# Altium PCB PCB3.PcbDoc
Units mil, origin at the board's own origin, x right, y up, seen from the top; angles counter-clockwise.
Board outline 2952.76 x 2690 mil, 2 copper layers (Top Layer, Bottom Layer); 45 components, 26 nets, 166 pads, 7 vias.
Unrouted connection lines stored in the file: 35.
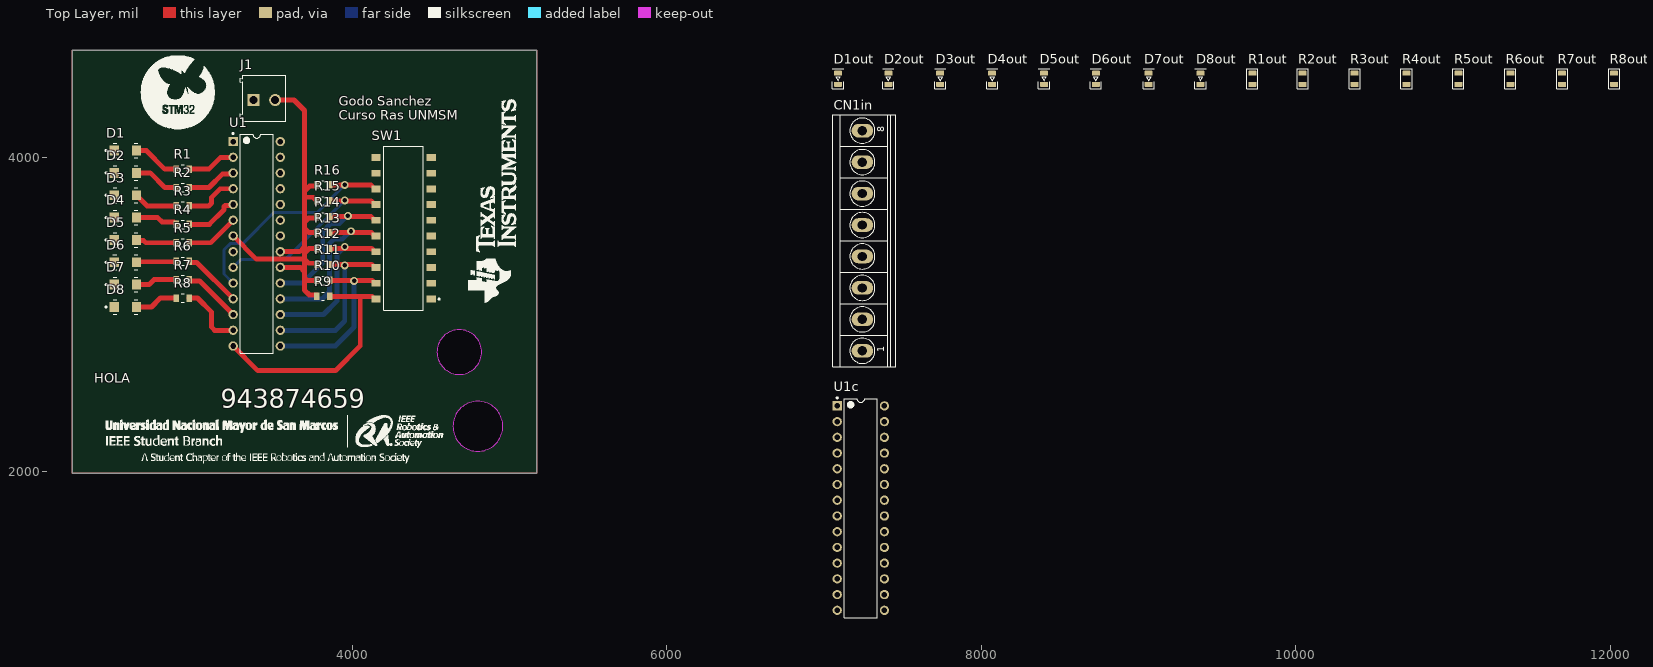
[diagram p0: Top Layer view]
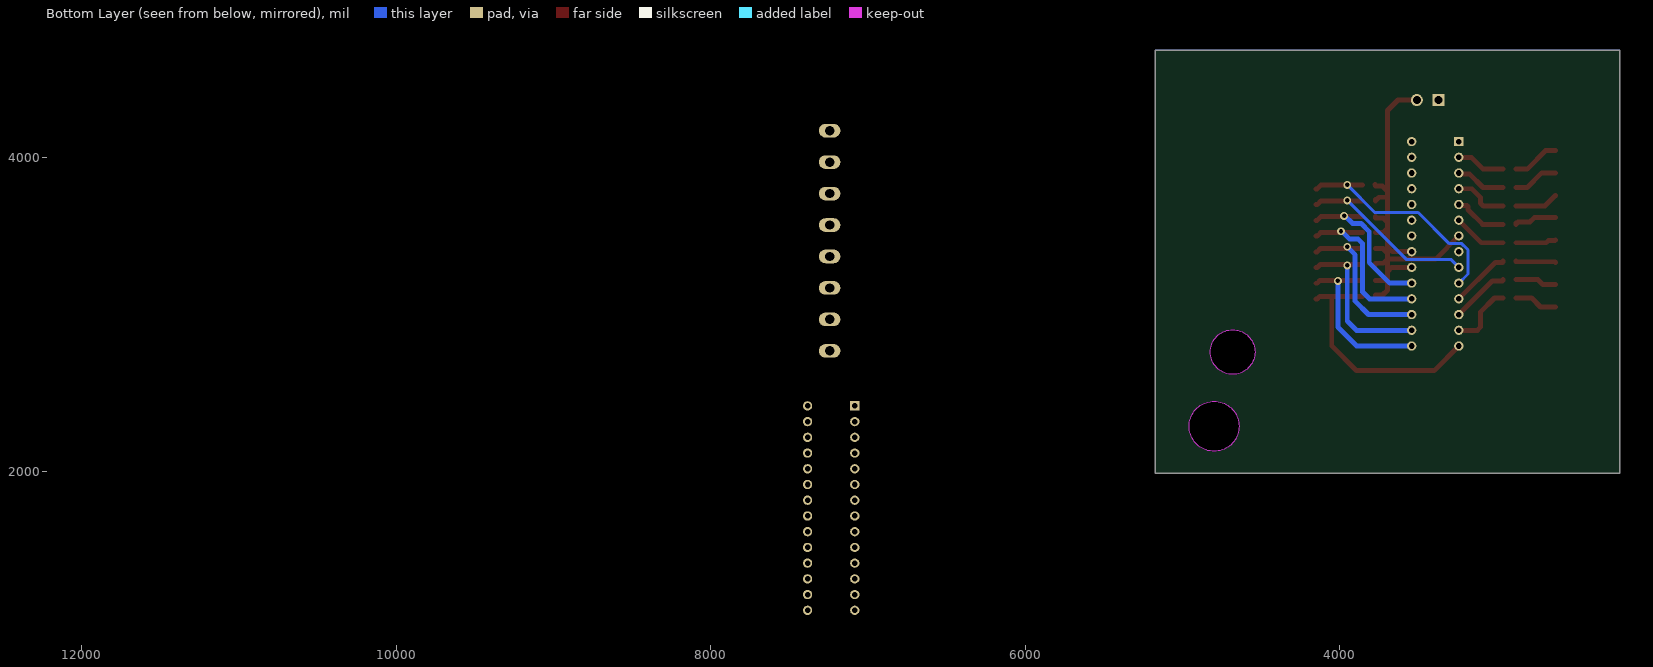
[diagram p1: Bottom Layer view, seen from below]

## Layer stack, top to bottom
Top Solder: solder mask 0.4, Solder Resist, Dk 3.5
Top Layer: signal copper 1.4
Dielectric 1: dielectric 12.6, FR-4, Dk 4.8
Bottom Layer: signal copper 1.4
Bottom Solder: solder mask 0.4, Solder Resist, Dk 3.5

## Board outline
2221.26,1990.79 2221.26,4680.79 5174.02,4680.79 5174.02,1990.79
cut-out: 4539.94,2762.44 ccw(c4681.89,2762.44) 4681.89,2620.49 ccw(c4681.89,2762.44) 4823.84,2762.44 ccw(c4681.89,2762.44) 4681.89,2904.39 ccw(c4681.89,2762.44)
cut-out: 4641.29,2290 ccw(c4800,2290) 4800,2131.29 ccw(c4800,2290) 4958.71,2290 ccw(c4800,2290) 4800,2448.71 ccw(c4800,2290)

## Design rules (kind name [scope] priority, off if disabled: settings)
AssemblyTestPointUsage [All] p1 off:
Clearance [All] p1 off: gap=10 ignorepadtopadclearanceinfootprint=FALSE except(0: Arc-Hole Track-Hole SMDPad-Hole THPad-Hole Via-Hole Fill-Hole Poly-Hole Region-Hole Text-Hole)
ComponentClearance [All] p1 off: gap=10 collisioncheckmode=3 verticalgap=10 showdistances=FALSE
DiffPairsRouting [All] p1 off: maxlimit=10 minlimit=10 mostfreqgap=10 toplayer_minwidth=15 toplayer_maxwidth=15 toplayer_prefwidth=15 bottomlayer_minwidth=15 bottomlayer_maxwidth=15 bottomlayer_prefwidth=15 maxuncoupledlength=500
FabricationTestPointUsage [All] p1 off: valid=0 allowmultiple=FALSE
FabricationTestpoint [All] p1 off: side=3 testpointundercomponent=TRUE minsize=40 maxsize=100 preferedsize=60 minholesize=0 maxholesize=40 preferedholesize=32 testpointgrid=1 allowsidetop=TRUE allowsidebottom=TRUE usegrid=TRUE gridtolerance=0.01
FanoutControl Fanout_BGA [IsBGA] p1 off: bgadir=Out bgaviamode=Centered fanoutstyle=Auto fanoutdirection=Alternating viagrid=1 // Fanout_BGA (Default Rule)
FanoutControl Fanout_LCC [IsLCC] p2 off: bgadir=Out bgaviamode=Centered fanoutstyle=Auto fanoutdirection=Alternating viagrid=1 // Fanout_LCC (Default Rule)
FanoutControl Fanout_SOIC [IsSOIC] p3 off: bgadir=Out bgaviamode=Centered fanoutstyle=Auto fanoutdirection=Alternating viagrid=1 // Fanout_SOIC (Default Rule)
FanoutControl Fanout_Small [(CompPinCount < 5)] p4 off: bgadir=Out bgaviamode=Centered fanoutstyle=Auto fanoutdirection=OutThenIn viagrid=1 // Fanout_Small (Default Rule)
FanoutControl Fanout_Default [All] p5 off: bgadir=Out bgaviamode=Centered fanoutstyle=Auto fanoutdirection=Alternating viagrid=1 // Fanout_Default (Default Rule)
Height [All] p1 off: minheight=0 maxheight=1000 prefheight=500
HoleSize [All] p1 off: absolutevalues=TRUE maxlimit=100 minlimit=1 maxpercent=80.000 minpercent=20.000
HoleToHoleClearance [All] p1 off: gap=10 allowstackedmicrovias=TRUE
LayerPairs [All] p1 off: enforce=TRUE
MinimumSolderMaskSliver [All] p1 off: minsoldermaskwidth=10
NetAntennae [All] p1 off: netantennaetolerance=0
PasteMaskExpansion [All] p1 off: expansion=0
PlaneClearance [All] p1 off: clearance=20
PlaneConnect [All] p1 off: planeconnectstyle=Relief reliefexpansion=20 reliefentries=4 reliefconductorwidth=10 reliefairgap=10
PolygonConnect [All] p1 off: connectstyle=Relief reliefconductorwidth=10 reliefentries=4 polygonreliefangle="90 Angle" airgapwidth=10
RoomDefinition U_Outputs [InComponentClass('U_Outputs')] p1 off: confinementstyle=ConfineIn formatcopy=TRUE lockcomponents=FALSE outline 7045,4425 12275,4425 12275,4675 7045,4675
RoomDefinition U_Input [InComponentClass('U_Input')] p2 off: confinementstyle=ConfineIn formatcopy=TRUE lockcomponents=FALSE outline 7045,2640 7470,2640 7470,4380 7045,4380
RoomDefinition U_CPU [InComponentClass('U_CPU')] p3 off: confinementstyle=ConfineIn formatcopy=TRUE lockcomponents=FALSE outline 7045,1060 7425,1060 7425,2590 7045,2590
RoutingCorners [All] p1 off: cornerstyle=45-Degree minsetback=100 maxsetback=100
RoutingLayers [All] p1 off: top layer_v5=TRUE bottom layer_v5=TRUE
RoutingPriority [All] p1 off: routingpriority=0
RoutingTopology [All] p1 off: topology=Shortest
RoutingVias [All] p1 off: holewidth=28 width=50 viastyle="Through Hole" minholewidth=28 minwidth=50 maxholewidth=28 maxwidth=50
ShortCircuit [All] p1 off: allowed=FALSE
SilkToSilkClearance [All] p1 off: silktosilkclearance=10
SilkToSolderMaskClearance [IsPad] p1 off: minsilkscreentomaskgap=10 clearancetoexposedcopper=TRUE
SolderMaskExpansion [All] p1 off: expansion=4 istentingtop=FALSE
UnRoutedNet [All] p1 off:
UnpouredPolygon [All] p1 off:
Width [All] p1 off: maxlimit=10 minlimit=10 preferedwidth=10
2 further rules are at their usual default settings.

## Classes and differential pairs
component class U_Outputs: D1out D2out D3out D4out D5out D6out D7out D8out R1out R2out R3out R4out R5out R6out R7out R8out
component class U_Input: CN1in
component class U_CPU: U1c

## Components (designator, comment, footprint, x,y, rotation, side; value= is the part's Value field where it differs from the comment)
CN1in "TB08" TB508-08 7245,3470 r90 top
D1 "LTST-C230KRKT" FP-LTST-C230KRKT-MFG 2558.11,4043.82 r0 top
D1out "LED" LED-0805 7090,4500 r90 top
D2 "LTST-C230KRKT" FP-LTST-C230KRKT-MFG 2558.11,3901.68 r0 top
D2out "LED" LED-0805 7410,4500 r90 top
D3 "LTST-C230KRKT" FP-LTST-C230KRKT-MFG 2558.11,3759.53 r0 top
D3out "LED" LED-0805 7740,4500 r90 top
D4 "LTST-C230KRKT" FP-LTST-C230KRKT-MFG 2558.11,3617.39 r0 top
D4out "LED" LED-0805 8070,4500 r90 top
D5 "LTST-C230KRKT" FP-LTST-C230KRKT-MFG 2558.11,3475.25 r0 top
D5out "LED" LED-0805 8400,4500 r90 top
D6 "LTST-C230KRKT" FP-LTST-C230KRKT-MFG 2558.11,3333.1 r0 top
D6out "LED" LED-0805 8730,4500 r90 top
D7 "LTST-C230KRKT" FP-LTST-C230KRKT-MFG 2558.11,3190.96 r0 top
D7out "LED" LED-0805 9065,4500 r90 top
D8 "LTST-C230KRKT" FP-LTST-C230KRKT-MFG 2558.11,3048.82 r0 top
D8out "LED" LED-0805 9395,4500 r90 top
J1 "691214110002" 691214110002 3441.73,4376.61 r0 top
R1 "RT0805BRD07249RL" FP-RT0805-MFG 2923.03,3925.79 r180 top value=249Ω
R1out "1k0" R0805 9725,4500 r90 top
R2 "RT0805BRD07249RL" FP-RT0805-MFG 2923.03,3808.64 r180 top value=249Ω
R2out "1k0" R0805 10045,4500 r90 top
R3 "RT0805BRD07249RL" FP-RT0805-MFG 2923.03,3691.5 r180 top value=249Ω
R3out "1k0" R0805 10375,4500 r90 top
R4 "RT0805BRD07249RL" FP-RT0805-MFG 2923.03,3574.36 r180 top value=249Ω
R4out "1k0" R0805 10705,4500 r90 top
R5 "RT0805BRD07249RL" FP-RT0805-MFG 2923.03,3457.22 r180 top value=249Ω
R5out "1k0" R0805 11035,4500 r90 top
R6 "RT0805BRD07249RL" FP-RT0805-MFG 2923.03,3340.07 r180 top value=249Ω
R6out "1k0" R0805 11365,4500 r90 top
R7 "RT0805BRD07249RL" FP-RT0805-MFG 2923.03,3222.93 r180 top value=249Ω
R7out "1k0" R0805 11695,4500 r90 top
R8 "RT0805BRD07249RL" FP-RT0805-MFG 2923.03,3105.79 r180 top value=249Ω
R8out "1k0" R0805 12025,4500 r90 top
R9 "RT0805BRD07249RL" FP-RT0805-MFG 3815.75,3116.77 r0 top value=249Ω
R10 "RT0805BRD07249RL" FP-RT0805-MFG 3815.75,3218.01 r0 top value=249Ω
R11 "RT0805BRD07249RL" FP-RT0805-MFG 3815.75,3319.25 r0 top value=249Ω
R12 "RT0805BRD07249RL" FP-RT0805-MFG 3815.75,3420.48 r0 top value=249Ω
R13 "RT0805BRD07249RL" FP-RT0805-MFG 3815.75,3521.72 r0 top value=249Ω
R14 "RT0805BRD07249RL" FP-RT0805-MFG 3815.75,3622.96 r0 top value=249Ω
R15 "RT0805BRD07249RL" FP-RT0805-MFG 3815.75,3724.2 r0 top value=249Ω
R16 "RT0805BRD07249RL" FP-RT0805-MFG 3815.75,3825.43 r0 top value=249Ω
SW1 "A6S-0102-PH" FP-A6S-0102-PH-MFG 4327.56,3549.84 r90 top
U1 "ATmega328-PU" 28P3 3393.78,3450.79 r0 top
U1c "ATmega328-PU" 28P3 7235,1770 r0 top

## Footprints (in the part's own frame and the unit in brackets; to place one, negate y for a bottom-side part, rotate by r counter-clockwise, add the part's x,y. Pads: shape width x height; smd on the part's side, far side on the other; paste and mask are expansions set on the pad)
28P3 [mm] "28-Pin Plastic Dual In-Line Package (PDIP)"
  rect 1.5x1.5 hole 0.9: 1(-3.81,16.51)
  round 1.5 hole 0.9: 2(-3.81,13.97) 3(-3.81,11.43) 4(-3.81,8.89) 5(-3.81,6.35) 6(-3.81,3.81) 7(-3.81,1.27) 8(-3.81,-1.27) 9(-3.81,-3.81) 10(-3.81,-6.35) 11(-3.81,-8.89) 12(-3.81,-11.43) 13(-3.81,-13.97) 14(-3.81,-16.51) 15(3.81,-16.51) 16(3.81,-13.97) 17(3.81,-11.43) 18(3.81,-8.89) 19(3.81,-6.35) 20(3.81,-3.81) 21(3.81,-1.27) 22(3.81,1.27) 23(3.81,3.81) 24(3.81,6.35) 25(3.81,8.89) 26(3.81,11.43) 27(3.81,13.97) 28(3.81,16.51)
  silkscreen extent -3.93,-17.7 2.65,17.93, body extent -3.6,-17.65 3.6,17.65, height 4.58
691214110002 [mm] "3.50 mm Horizontal Entry Modular, 2p"
  rect 1.95x1.95 hole 1.3: 1(-1.75,-0.3)
  round 1.95 hole 1.3: 2(1.75,-0.3)
  silkscreen extent -3.9,-3.7 3.5,3.7, body extent -3.95,-3.7 3.5,3.7, height 8.55
FP-A6S-0102-PH-MFG [mm]
  rect 1.1x1.5 smd paste+0 mask+0: 1(-11.43,-4.45) 2(-8.89,-4.45) 3(-6.35,-4.45) 4(-3.81,-4.45) 5(-1.27,-4.45) 6(1.27,-4.45) 7(3.81,-4.45) 8(6.35,-4.45) 9(8.89,-4.45) 10(11.43,-4.45) 11(11.43,4.45) 12(8.89,4.45) 13(6.35,4.45) 14(3.81,4.45) 15(1.27,4.45) 16(-1.27,4.45) 17(-3.81,4.45) 18(-6.35,4.45) 19(-8.89,4.45) 20(-11.43,4.45)
  silkscreen extent -13.27,-5.88 13.27,3.2, body extent -13.37,-5.3 13.37,5.3, height 0.25
FP-LTST-C230KRKT-MFG [mm]
  rect 1.5x1.6 smd paste+0 mask+0: 1(-1.8,0) 2(1.8,0)
  silkscreen extent -3.22,-1.19 1.99,1.19, body extent -2.65,-0.95 2.65,0.95, height 0.25
FP-RT0805-MFG [mm]
  rect 0.9x1.2 smd paste+0 mask+0: 1(-1.05,0) 2(1.05,0)
  silkscreen extent -0.23,-0.67 0.23,0.67, body extent -1.6,-0.77 1.6,0.77, height 0.25
LED-0805 [mm] "SMT LED DIODE 0805"
  rrect25% 0.8x1.3 smd: 1(-0.9,0) 2(0.9,0)
  silkscreen extent -1.6,-0.9 1.6,0.9, body extent -1.01,-0.62 1.01,0.63, height 1.1
R0805 [mm] "SMD RESISTOR 0805"
  rrect25% 0.8x1.3 smd: 1(-0.9,0) 2(0.9,0)
  silkscreen extent -1.6,-0.9 1.6,0.9, body extent -1,-0.62 1,0.63, height 0.45
TB508-08 [mm] "Vertical terminal block 0.2 inch (5.08mm) pitch"
  oval 2.2x3.5 hole 1.5: 1(-17.78,0) 2(-12.7,0) 3(-7.62,0) 4(-2.54,0) 5(2.54,0) 6(7.62,0) 7(12.7,0) 8(17.78,0)
  silkscreen extent -20.32,-5.4 20.32,4.8, body extent -20.86,-4.67 20.35,4.83, height 15.03

## Part data
CN1in: library part TB-08, "Terminal Block"
D1 D2 D3 D4 D5 D6 D7 D8: library part CMP-22017-000041-1, "LED RED CLEAR CHIP SMD", Case Code (Imperial)=1206, Case Code (Metric)=3216, Color=Red, Forward Current=30mA, Forward Voltage=2V, Lens Color=Colorless, Max Operating Temperature=85°C, Min Operating Temperature=-55°C, Package Quantity=1, Power Dissipation=75mW, Reverse Voltage=5V, Test Current=20mA, Case/Package=1206, Depth=1.6mm, Dominant Wavelength=631nm, Height=1.1mm, Illumination Color=Red, Lead Free="Lead Free", Length=3.2mm, Lens Style=Diffused, Lens Transparency=Clear, Luminous Intensity=54mcd, Mount="Surface Mount", Number of Elements=1, Number of LEDs=1, Number of Pins=2, Packaging="Tape and Reel", Power Rating=75mW, Radiation Hardening=No, RoHS Compliant=Yes, Viewing Angle=130°, Wavelength=639nm, Width=1.6mm
D1out D2out D3out D4out D5out D6out D7out D8out: "LED - Light-Emitting Diode"
J1: library part CMP-1502-02464-1, "Serie 2141 - 3.50 mm Horizontal Entry Modular with Rising Cage Clamp WR-TBL, 2 pin", Manufacturer="Wurth Elektronik", Operating Temperature=-40to105degC, Datasheet URL=http://katalog.we-online.de/em/datasheet/6912141100xx.pdf, Manufacturer URL=http://www.we-online.de, Mounting Technology=THT, Package Reference=691214110002, Packaging=Box, Part number=691214110002, Pin Number=2, Pitch=3.50mm, Publisher=WurthElektronik
R1 R2 R3 R4 R5 R6 R7 R8 R9 R10 R11 R12 R13 R14 R15 R16: library part CMP-03412-035801-1, "RES SMD 249 OHM 0.1% 1/8W 0805", Manufacturer=Yageo, Package=RT0805, Power Rating=0.125W, Resistance=249Ω, Temperature="-55°C to +155°C", Temperature Coefficient="25 ppm/°C", Temperature Range High=+155°C, Temperature Range Low=-55°C, Tolerance=0.0025, Voltage Rating=150V, Automotive=No, Category=Res, ComponentLink2Description=Datasheet, ComponentLink2URL=http://www.yageo.com/documents/recent/PYu-RT_1-to-0.01_RoHS_L_9.pdf, Composition="Thin Film", Device Class L1="Passive Components", Device Class L2=Resistors, Device Class L3="Chip SMD Resistors", Digikey Description="RES SMD 249 OHM 0.1% 1/8W 0805", Footprint Url=http://www.yageo.com/exep/pages/download/literatures/PYu-R_Mount_10.pdf, Height=0.6mm, Ipc Land Pattern Name=RESC200125X50, Lead Free=Yes, Manufacturer Part Number=RT0805BRD07249RL, Mouser Description="Res SMD 249 Ohm .1% 0805", Octopart=https://octopart.com/rt0805brd07249rl-yageo-1410573, RoHS=TRUE, Series=RT
R1out R2out R3out R4out R5out R6out R7out R8out: library part Resistor, "Single resistor", Power=0.125W, Unit price=0.1
SW1: library part CMP-08827-000074-1, "SWITCH SLIDE DIP SPST 25MA 24V", Case/Package=DIP, Contact Resistance=200mR, Current Rating=25mA, Max Operating Temperature=70°C, Max Voltage Rating (DC)=24V, Min Operating Temperature=-20°C, Package Quantity=900, Actuator Length=0mm, Actuator Type="Slide (Standard)", Contact Plating=Gold, Electrical Life=1000Cycles, Length=1.037inch, Max Current Rating=25mA, Mechanical Life=1000Cycles, Mount="Surface Mount", Number of Positions=10, Orientation=Straight, Packaging="Tape and Reel", Pitch=0.1inch, Radiation Hardening=No, RoHS Compliant=Yes, Series=A6S-H, Terminal Pitch=2.54mm, Termination="Gull Wing", Throw Configuration=SPST, Voltage Rating (DC)=24V, Washable=Yes, Weight=0.87g
U1 U1c: library part CMP-0095-00015-2, "8-bit AVR Microcontroller, 32KB Flash, 1KB EEPROM, 2KB SRAM, 28-pin PDIP, Industrial Grade (-40°C to 85°C)", ComponentLink1Description="Manufacturer URL", ComponentLink1URL=http://www.atmel.com/, ComponentLink2Description="ATmega48A/48PA/88A/88PA/168A/168PA/328/328P Datasheet", ComponentLink2URL=http://www.atmel.com/dyn/resources/prod_documents/8271.pdf, ComponentLink3Description="ATmega48A/48PA/88A/88PA/168A/168PA/328/328P Summary", ComponentLink3URL=http://www.atmel.com/dyn/resources/prod_documents/8271S.pdf, DatasheetVersion="revD, May-2011", PackageDescription="28-lead (0.300\"/7.62mm Wide) Plastic Dual Inline Package (PDIP)", PackageReference=28P3, PackageVersion="revB, Sep-2001", RevisionNote="DatasheetVersion updated. URLs added."

## Via types
v1: diameter 50, hole 28, Top Layer to Bottom Layer, 7 vias

## Nets (pads, with @x,y where several pads share a name; then routed paths per layer and width w, separated by ;. In a path a pad name is that pad's centre, name@x,y a point inside that pad or via, vN(x,y) a via of type N, cw(c..) or ccw(c..) an arc to the next point about the centre after c; other vN are vias at no path point)
GND: D1out.1 D2out.1 D3out.1 D4out.1 D5out.1 D6out.1 D7out.1 D8out.1 U1c.8 U1c.22
In0: CN1in.8 U1c.14
In1: CN1in.7 U1c.15
In2: CN1in.6 U1c.16
In3: CN1in.5 U1c.17
In4: CN1in.4 U1c.18
In5: CN1in.3 U1c.19
In6: CN1in.2 U1c.9
In7: CN1in.1 U1c.10
NetD1out_2: D1out.2 R1out.1
NetD2out_2: D2out.2 R2out.1
NetD3out_2: D3out.2 R3out.1
NetD4out_2: D4out.2 R4out.1
NetD5out_2: D5out.2 R5out.1
NetD6out_2: D6out.2 R6out.1
NetD7out_2: D7out.2 R7out.1
NetD8out_2: D8out.2 R8out.1
Out0: R8out.2 U1c.2
Out1: R7out.2 U1c.3
Out2: R6out.2 U1c.4
Out3: R5out.2 U1c.5
Out4: R4out.2 U1c.6
Out5: R3out.2 U1c.11
Out6: R2out.2 U1c.12
Out7: R1out.2 U1c.13
VCC: U1c.7 U1c.20 U1c.21
pads on no net: D1.1 D1.2 D2.1 D2.2 D3.1 D3.2 D4.1 D4.2 D5.1 D5.2 D6.1 D6.2 D7.1 D7.2 D8.1 D8.2 J1.1 J1.2 R1.1 R1.2 R2.1 R2.2 R3.1 R3.2 R4.1 R4.2 R5.1 R5.2 R6.1 R6.2 R7.1 R7.2 R8.1 R8.2 R9.1 R9.2 R10.1 R10.2 R11.1 R11.2 R12.1 R12.2 R13.1 R13.2 R14.1 R14.2 R15.1 R15.2 R16.1 R16.2 SW1.1 SW1.2 SW1.3 SW1.4 SW1.5 SW1.6 SW1.7 SW1.8 SW1.9 SW1.10 SW1.11 SW1.12 SW1.13 SW1.14 SW1.15 SW1.16 SW1.17 SW1.18 SW1.19 SW1.20 U1.1 U1.2 U1.3 U1.4 U1.5 U1.6 U1.7 U1.8 U1.9 U1.10 U1.11 U1.12 U1.13 U1.14 U1.15 U1.16 U1.17 U1.18 U1.19 U1.20 U1.21 U1.22 U1.23 U1.24 U1.25 U1.26 U1.27 U1.28 U1c.1 U1c.23 U1c.24 U1c.25 U1c.26 U1c.27 U1c.28
copper on no net: | length 17638.4
  Top Layer w31.5: 2628.98,3048.82 2724.17,3048.82 2781.14,3105.79 2881.69,3105.79 ; 2628.98,3190.96 2708.84,3190.96 2740.8,3222.93 2881.69,3222.93 ; 2628.98,3333.1 2632.46,3336.59 2879.72,3336.59 2881.69,3338.56 2881.69,3340.07 ; 2628.98,3475.25 2633.12,3471.1 2674.02,3471.1 2687.9,3457.22 2881.69,3457.22 ; 2628.98,3617.39 2763.95,3617.39 2792.13,3589.21 2866.84,3589.21 2873.82,3582.23 2879.72,3582.23 2881.69,3580.26 2881.69,3574.36 ; 2628.98,3759.53 2628.98,3757.56 2642.76,3743.78 2644.72,3743.78 2697.01,3691.5 2881.69,3691.5 ; 2628.98,3901.68 2715.88,3901.68 2808.91,3808.64 2881.69,3808.64 ; 2628.98,4043.82 2691.85,4043.82 2809.88,3925.79 2881.69,3925.79 ; 2964.37,3105.79 3017.36,3105.79 3107.09,3016.06 3107.09,2919.92 3126.22,2900.79 3243.78,2900.79 ; 2964.37,3222.93 2964.37,3217.2 2966.34,3215.24 3029.33,3215.24 3243.78,3000.79 ; 2964.37,3340.07 2964.37,3334.17 2966.34,3332.2 3012.37,3332.2 3243.78,3100.79 ; 2964.37,3457.22 3100.21,3457.22 3243.78,3600.79 ; 2964.37,3574.36 3092.23,3574.36 3185.83,3667.95 3185.83,3688.87 3192.47,3695.51 3238.51,3695.51 3243.78,3700.79 ; 2964.37,3691.5 3088.64,3691.5 3107.09,3709.95 3107.09,3746.69 3161.18,3800.79 3243.78,3800.79 ; 2964.37,3808.64 3090.3,3808.64 3177.17,3895.51 3238.51,3895.51 3243.78,3900.79 ; 2964.37,3925.79 3089.33,3925.79 3164.33,4000.79 3243.78,4000.79 ; 3243.78,2800.79 3400.24,2644.33 3894.49,2644.33 4051.97,2801.81 4051.97,3116.77 ; 3243.78,3500.79 3391.57,3352.99 3697.64,3352.99 ; 3490.94,4364.8 3630.71,4364.8 3697.64,4297.87 3697.64,3786.06 ; 3543.78,3300.79 3671.1,3300.79 3697.64,3274.25 ; 3543.78,3400.79 3666.69,3400.79 3697.64,3431.73 ; 3774.41,3116.77 3774.41,3122.68 3772.44,3124.65 3729.13,3124.65 3697.64,3156.14 3697.64,3234.88 ; 3774.41,3218.01 3714.51,3218.01 3697.64,3234.88 ; 3774.41,3319.25 3774.41,3325.15 3772.44,3327.12 3723.51,3327.12 3697.64,3352.99 ; 3774.41,3420.48 3725.76,3420.48 3697.64,3392.36 ; 3774.41,3521.72 3725.76,3521.72 3697.64,3549.84 ; 3774.41,3622.96 3774.41,3617.05 3772.44,3615.08 3723.51,3615.08 3697.64,3589.21 ; 3774.41,3724.2 3774.41,3730.1 3772.44,3732.07 3766.54,3732.07 3751.91,3746.69 3697.64,3746.69 ; 3776.38,3827.4 3774.41,3825.43 3774.41,3819.53 3772.44,3817.56 3729.13,3817.56 3697.64,3786.06 ; 3857.09,3116.77 4051.97,3116.77 ; 3857.09,3218.01 4126.32,3218.01 4144.49,3199.84 4152.36,3199.84 ; 3857.09,3319.25 4125.08,3319.25 4144.49,3299.84 4152.36,3299.84 ; 3857.09,3420.48 4123.85,3420.48 4144.49,3399.84 4152.36,3399.84 ; 3857.09,3521.72 4122.61,3521.72 4144.49,3499.84 4152.36,3499.84 ; 3857.09,3622.96 4121.37,3622.96 4144.49,3599.84 4152.36,3599.84 ; 3857.09,3724.2 4120.14,3724.2 4144.49,3699.84 4152.36,3699.84 ; 3857.09,3825.43 4118.9,3825.43 4144.49,3799.84 4152.36,3799.84 ; 4152.36,3099.84 4144.49,3099.84 4127.56,3116.77 4051.97,3116.77 ; 3697.64,3234.88 3697.64,3274.25 ; 3697.64,3274.25 3697.64,3352.99 ; 3697.64,3352.99 3697.64,3392.36 ; 3697.64,3392.36 3697.64,3431.73 ; 3697.64,3431.73 3697.64,3549.84 ; 3697.64,3549.84 3697.64,3589.21 ; 3697.64,3589.21 3697.64,3746.69 ; 3697.64,3746.69 3697.64,3786.06
  Bottom Layer w19.68: 3243.78,3200.79 3185.83,3258.74 3185.83,3412.05 3194.41,3420.63 3194.41,3421.24 3224.59,3451.42 3303.94,3451.42 3502.68,3650.16 3778.27,3650.16 v1(3953.54,3825.43) ; 3243.78,3300.79 3294.41,3351.42 3577.95,3351.42 v1(3953.54,3727.01)
  Bottom Layer w31.5: 3543.78,2800.79 3544.8,2801.81 3894.49,2801.81 4012.6,2919.92 v1(4012.6,3215.2) ; 3543.78,2900.79 3895.04,2900.79 3953.54,2959.29 v1(3953.54,3313.62) ; 3543.78,3000.79 3817.87,3000.79 3902.8,3085.71 3902.8,3380.31 3953.54,3431.06 v1(3953.54,3431.73) ; 3543.78,3100.79 3812.05,3100.79 3855.12,3143.86 3855.12,3451.42 3886.18,3482.48 3940.23,3482.48 3987.91,3530.16 v1(3992.91,3530.16) ; 3543.78,3200.79 3683.23,3200.79 3813.62,3331.18 3813.62,3528.03 3866.09,3580.5 3920.14,3580.5 3968.22,3628.58 v1(3973.23,3628.58)

## Polygon pours and split planes (outlines as drawn)
no net on Top Layer "NONET_L01_P000" (solid, pour order 0): 2221.26,1990.79 2221.26,4680.79 5174.02,4680.79 5174.02,1990.79
no net on Bottom Layer "NONET_L02_P001" (solid, pour order 1): 2221.26,1990.79 2221.26,4680.79 5174.02,4680.79 5174.02,1990.79

## Silkscreen, mask and mechanical layers (free items; w line width, h text height)
Top Overlay:
  drawing of 175 lines, arcs and shapes, not listed
  text "Godo Sanchez / Curso Ras UNMSM" at 3914.17,4238.82 h60
  text "HOLA" at 2359.06,2565.59 h60
  text "943874659" at 3166.14,2408.11 h118.11
Mechanical 1:
  circle w10: c4681.89,2762.44 r141.95
  circle w10: c4800,2290 r158.71
  lines w47.24: 2221.26,1990.79 5174.02,1990.79 5174.02,4680.79 2221.26,4680.79 2221.26,1990.79

## Text inside footprints (layer, text, board x,y; h text height)
CN1in: Top Overlay "8" at 7385,4160 h43.31 r90; Top Overlay "1" at 7385,2760 h43.31 r90